# Altium PCB Sheet1.PcbDoc
Units mil, origin at the board's own origin, x right, y up, seen from the top; angles counter-clockwise.
Board outline 5395 x 1860 mil, 2 copper layers (Top Layer, Bottom Layer); 20 components, 22 nets, 127 pads, 0 vias.
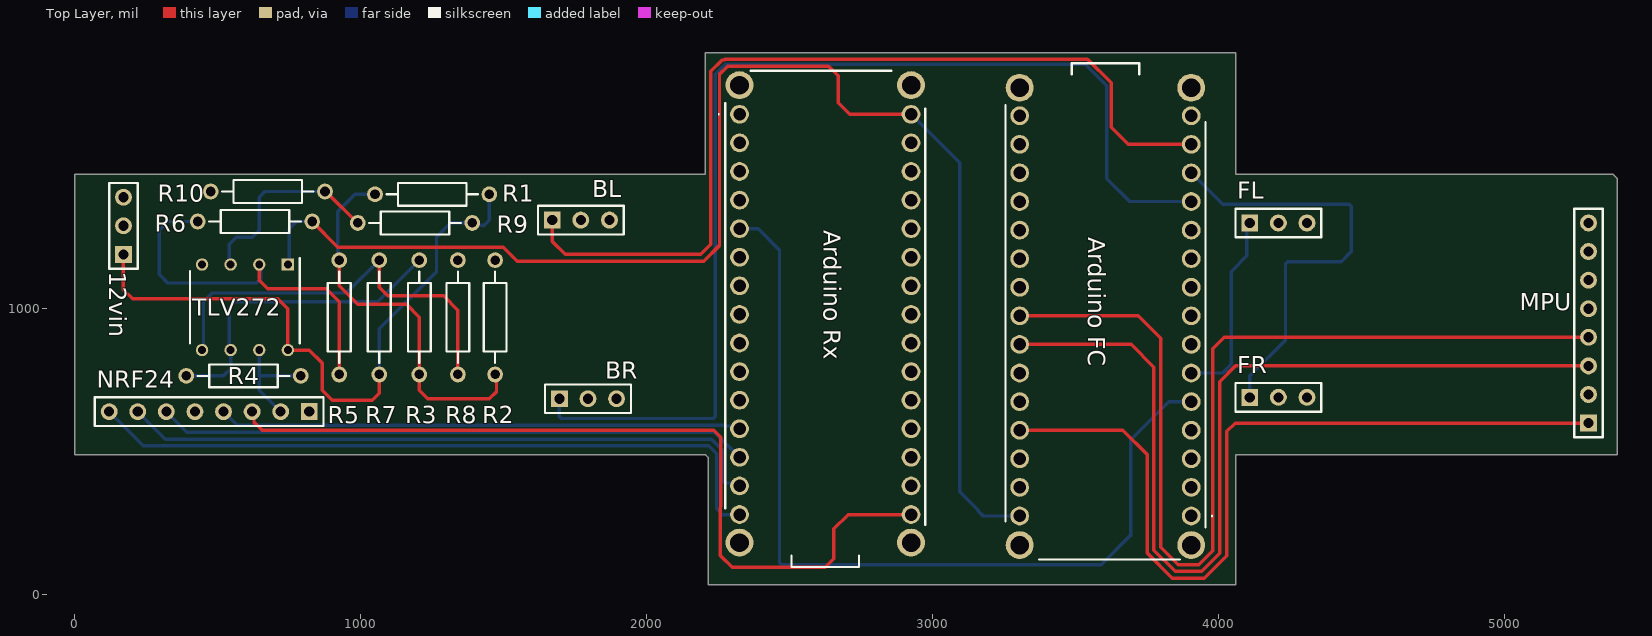
[diagram p0: Top Layer view]
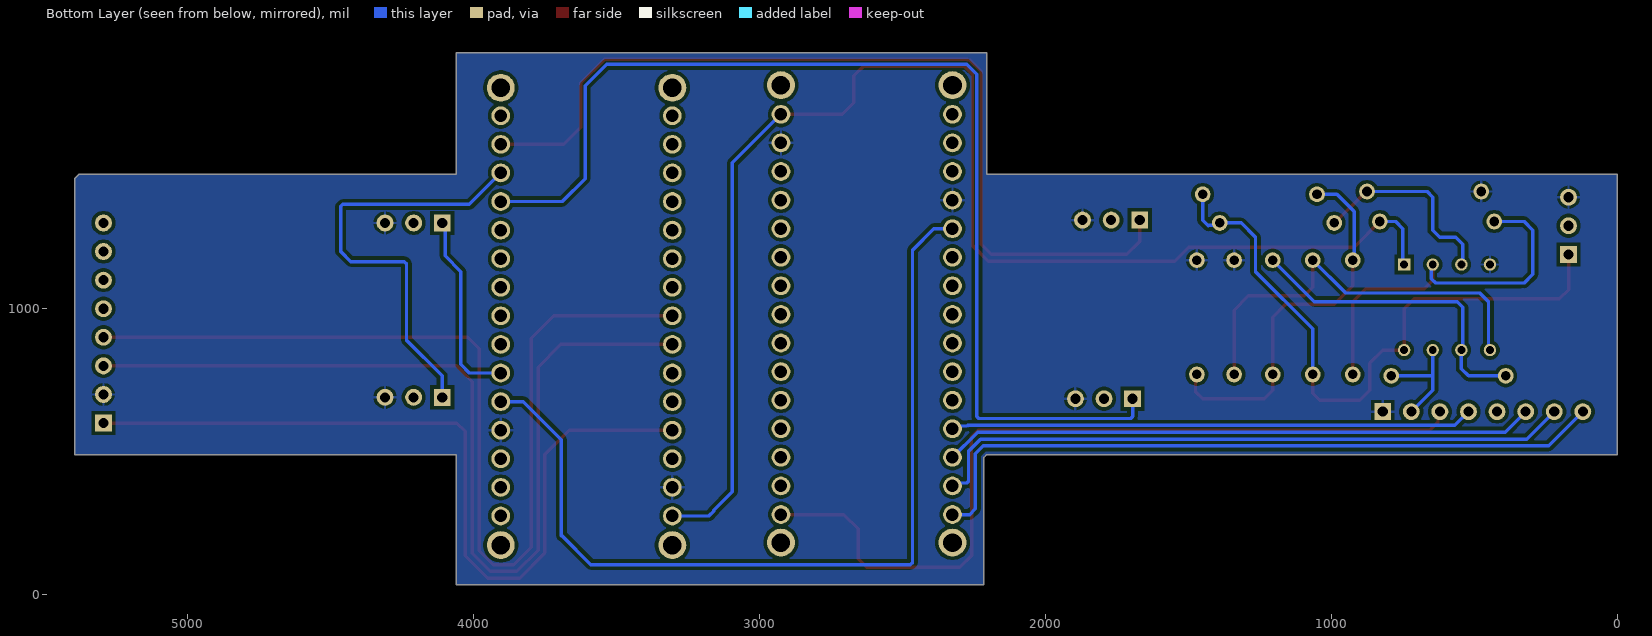
[diagram p1: Bottom Layer view, seen from below]

## Layer stack, top to bottom
Top Solder: solder mask 0.4, Solder Resist, Dk 3.5
Top Layer: signal copper 1.4
Dielectric 1: dielectric 12.6, FR-4, Dk 4.8
Bottom Layer: signal copper 1.4
Bottom Solder: solder mask 0.4, Solder Resist, Dk 3.5

## Board outline
5395,490 4060,490 4060,35 2215,35 2215,480 2205,490 0,490 0,1470 2205,1470 2205,1895 4060,1895 4060,1470 5380,1470 5395,1455

## Design rules (kind name [scope] priority, off if disabled: settings)
Clearance [All] p1: gap=12 ignorepadtopadclearanceinfootprint=FALSE except(0: Text-Hole)
PolygonConnect [All] p1: connectstyle=Relief reliefconductorwidth=10 reliefentries=4 polygonreliefangle="90 Angle" airgapwidth=10
RoutingVias [All] p1: holewidth=28 width=50 viastyle="Through Hole" minholewidth=28 minwidth=50 maxholewidth=28 maxwidth=50
SolderMaskExpansion [All] p1: expansion=4 istentingtop=FALSE
Width [All] p1: maxlimit=15 minlimit=10 preferedwidth=12 minimp=50.000000 maximp=50.000000 favimp=50.000000
30 further rules are at their usual default settings.

## Components (designator, comment, footprint, x,y, rotation, side; value= is the part's Value field where it differs from the comment)
12vin "Header 3" HDR1X3 170,1190 r90 top
"Arduino FC" "ABX00053" ABX00053 3905,275 r180 top (schematic designator "Arduino FC?")
"Arduino Rx" "ABX00053" ABX00053 2325,1680 r0 top (schematic designator "Arduino Rx?")
BL "Header 3" HDR1X3 1670,1310 r0 top (schematic designator BL?)
BR "Header 3" HDR1X3 1695,685 r0 top (schematic designator BR?)
FL "Header 3" HDR1X3 4110,1300 r0 top (schematic designator FL?)
FR "Header 3" HDR1X3 4110,690 r0 top (schematic designator FR?)
MPU "Header 8" HDR1X8 5295,600 r90 top (schematic designator MPU_?)
NRF24 "Header 8" HDR1X8 820,640 r180 top (schematic designator NRF?)
R1 "Res1" AXIAL-0.4 1250,1400 r180 top value=15k
R2 "Res2" AXIAL-0.4 1470,970 r90 top value=18k
R3 "Res3" AXIAL-0.4 1205,970 r90 top value=22k
R4 "Res4" AXIAL-0.4 590,765 r0 top value=12k
R5 "Res5" AXIAL-0.4 925,970 r270 top value=12k
R6 "Res6" AXIAL-0.4 630,1305 r180 top value=18k
R7 "Res7" AXIAL-0.4 1065,970 r90 top value=22k
R8 "Res8" AXIAL-0.4 1340,970 r90 top value=12k
R9 "Res9" AXIAL-0.4 1190,1300 r180 top value=12k
R10 "Res10" AXIAL-0.4 675,1410 r180 top value=18k
TLV272 "TL072CP" DIP760W50P254L976H406Q8N 595,1005 r270 top

## Footprints (in the part's own frame and the unit in brackets; to place one, negate y for a bottom-side part, rotate by r counter-clockwise, add the part's x,y. Pads: shape width x height; smd on the part's side, far side on the other; paste and mask are expansions set on the pad)
ABX00053 [mm]
  round 1.665 hole 1.11: 1(0,0) 2(0,-2.54) 3(0,-5.08) 4(0,-7.62) 5(0,-10.16) 6(0,-12.7) 7(0,-15.24) 8(0,-17.78) 9(0,-20.32) 10(0,-22.86) 11(0,-25.4) 12(0,-27.94) 13(0,-30.48) 14(0,-33.02) 15(0,-35.56) 16(15.24,-35.56) 17(15.24,-33.02) 18(15.24,-30.48) 19(15.24,-27.94) 20(15.24,-25.4) 21(15.24,-22.86) 22(15.24,-20.32) 23(15.24,-17.78) 24(15.24,-15.24) 25(15.24,-12.7) 26(15.24,-10.16) 27(15.24,-7.62) 28(15.24,-5.08) 29(15.24,-2.54) 30(15.24,0)
  round 2.475 hole 1.65: MH1(0,2.59) MH2(15.24,2.59) MH3(0,-38.05) MH4(15.24,-38.05)
  silkscreen extent -1.9,-40.23 16.5,3.86
AXIAL-0.4 [mm] "Axial Device, Thru-Hole; 2 Leads; 0.4 in Pin Spacing"
  round 1.4 hole 0.85: 1(-5.08,0) 2(5.08,0)
  silkscreen extent -4.06,-1.02 4.06,1.02
DIP760W50P254L976H406Q8N [mm]
  rect 1.1x1.1 / inner round 1.1 / far side rect 1.1x1.1 hole 0.7: 1(-3.8,3.81)
  round 1.1 hole 0.7: 2(-3.8,1.27) 3(-3.8,-1.27) 4(-3.8,-3.81) 5(3.8,-3.81) 6(3.8,-1.27) 7(3.8,1.27) 8(3.8,3.81)
  silkscreen extent -4.35,-4.88 3.2,4.88
HDR1X3 [mm] "Connector; Header; 3 Position"
  rect 1.5x1.5 hole 0.9: 1(0,0)
  round 1.5 hole 0.9: 2(2.54,0) 3(5.08,0)
  silkscreen extent -1.27,-1.27 6.35,1.27
HDR1X8 [mm] "Connector; Header; 8 Position"
  rect 1.5x1.5 hole 0.9: 1(0,0)
  round 1.5 hole 0.9: 2(2.54,0) 3(5.08,0) 4(7.62,0) 5(10.16,0) 6(12.7,0) 7(15.24,0) 8(17.78,0)
  silkscreen extent -1.27,-1.27 19.05,1.27

## Part data
12vin BL BR FL FR: "Header, 3-Pin", LatestRevisionDate=17-Jul-2002, LatestRevisionNote="Re-released for DXP Platform.", Publisher="Altium Limited"
"Arduino FC" "Arduino Rx": "Development Boards & Kits - AVR Arduino Nano RP2040 Connect with header", Manufacturer_Name=Arduino, Mouser Part Number=782-ABX00053, Arrow Part Number=ABX00053, Arrow Price/Stock=https://www.arrow.com/en/products/abx00053/arduino-corporation?region=nac, Datasheet Link=https://content.arduino.cc/assets/ABX00053-datasheet.pdf, Geometry.Height=3.25mm, Manufacturer_Part_Number=ABX00053, Mouser Price/Stock=https://www.mouser.co.uk/ProductDetail/Arduino/ABX00053?qs=iLbezkQI%252Bsj092HEuR%252Bsvg%3D%3D
MPU NRF24: "Header, 8-Pin", LatestRevisionDate=17-Jul-2002, LatestRevisionNote="Re-released for DXP Platform.", Publisher="Altium Limited"
R1 R3 R4 R5 R6 R7 R8 R9 R10: library part Res2, "Resistor", LatestRevisionDate=17-Jul-2002, LatestRevisionNote="Re-released for DXP Platform.", PackageDescription="Axial Device, Thru-Hole; 2 Leads; 0.4 in Pin Spacing", PackageReference=AXIAL-0.4, Published=8-Jun-2000, Publisher="Altium Limited"
R2: "Resistor", LatestRevisionDate=17-Jul-2002, LatestRevisionNote="Re-released for DXP Platform.", PackageDescription="Axial Device, Thru-Hole; 2 Leads; 0.4 in Pin Spacing", PackageReference=AXIAL-0.4, Published=8-Jun-2000, Publisher="Altium Limited"
TLV272: "Operational Amplifier, 2 Func, 13000uV Offset-Max, PDIP8", Manufacturer_Name=STMicroelectronics, Datasheet Link=https://datasheet.datasheetarchive.com/originals/distributors/Datasheets-112/DSAP0044997.pdf, Geometry.Height=4.06mm, Manufacturer_Part_Number=TL072CP

## Nets (pads, with @x,y where several pads share a name; then routed paths per layer and width w, separated by ;. In a path a pad name is that pad's centre, name@x,y a point inside that pad or via, vN(x,y) a via of type N, cw(c..) or ccw(c..) an arc to the next point about the centre after c; other vN are vias at no path point)
3.3V: NRF24.2 R4.2 TLV272.7 | length 393.5
  Bottom Layer w12: TLV272.7 645,770 ; NRF24.2 645,715 645,770 ; R4.2 650,765 645,770
5V: "Arduino FC.27" MPU.1 | length 2886.3
  Top Layer w12: 3305,575 3665.68,575 3750.68,490 3750.68,145.38 3839.06,57 3951.21,57 4030,135.79 4030,571 4059,600 MPU.1
Analog4: "Arduino FC.23" MPU.4 | length 3521
  Top Layer w12: 3305,975 3720,975 3798.68,896.32 3798.68,166.32 3860,105 3931.33,105 3980,153.67 3980,860 4020,900 MPU.4
Analog5: "Arduino FC.24" MPU.3 | length 3343.2
  Top Layer w12: 3305,875 3695,875 3774.68,795.32 3774.68,155.32 3849,81 3941.27,81 4005,144.73 4005,745 4060,800 MPU.3
CE: "Arduino Rx.12" NRF24.4 | length 1829.9
  Bottom Layer w12: NRF24.4 568,592 2271.94,592 2274.22,589.72 2315.28,589.72 2325,580
CNS: "Arduino Rx.13" NRF24.6 | length 2071.3
  Bottom Layer w12: NRF24.6 392,568 2237,568 2325,480
GND: 12vin.3 "Arduino FC.4" "Arduino FC.29" "Arduino Rx.4" "Arduino Rx.29" BL.3 BR.3 FL.3 FR.3 MPU.2 NRF24.1 R2.2 R8.2 R10.2 TLV272.4
M1: "Arduino FC.6" FL.1 | length 674.4
  Bottom Layer w12: 3905,775 4015,775 4045,805 4045,1130 4100,1185 4100,1290 FL.1
M2: "Arduino FC.12" BR.1 | length 3878.5
  Bottom Layer w12: BR.1 1695,623.03 1702.03,616 2232.97,616 2240,623.03 2240,1820 2275,1855 3535,1855 3610,1780 3610,1455 3690,1375 3905,1375
M3: "Arduino FC.13" FR.1 | length 1533.6
  Bottom Layer w12: 3905,1475 4015,1365 4457.97,1365 4465,1357.97 4465,1200 4430,1165 4242.03,1165 4235,1157.97 4235,890 4110,765 FR.1
M4: "Arduino FC.14" BL.1 | length 3179.9
  Top Layer w12: BL.1 1670,1235 1715,1190 2190,1190 2225,1225 2225,1830 2265,1870 2271.06,1870 2273.75,1872.69 3542.31,1872.69 3625,1790 3625,1635 3685,1575 3905,1575
MISO: "Arduino Rx.15" NRF24.8 | length 2466.7
  Bottom Layer w12: NRF24.8 240,520 2217.12,520 2245,492.12 2245,300 2265,280 2325,280
MOSI: "Arduino Rx.14" NRF24.7 | length 2274.8
  Bottom Layer w12: NRF24.7 316,544 2227.06,544 2269,502.06 2269,396 2274.75,390.25 2314.75,390.25 2325,380
Net12vin_1: 12vin.1 R1.1 R7.1 R9.1 TLV272.8 | length 2265
  Top Layer w12: 12vin.1 170,1067.03 202.03,1035 710,1035 745,1000 TLV272.8 819.61,855.39 865,810 865,715 900,680 1040,680 1065,705 R7.1
  Bottom Layer w12: R7.1 1065,930 1265,1130 1265,1250 1315,1300 R9.1 1398.25,1291.75 1428.25,1291.75 1430,1290 1450,1310 R1.1
"NetArduino FC?_30": "Arduino FC.30" "Arduino Rx.30" R6.1 TLV272.1 | length 4766.9
  Top Layer w12: R6.1 919.44,1215.56 1497.94,1215.56 1547.5,1166 2199.94,1166 2255,1221.06 2255,1820 2283.69,1848.69 2636.31,1848.69 2670,1815 2670,1720 2710,1680 2925,1680
  Bottom Layer w12: TLV272.1 750,1159.61 750,1280 775,1305 R6.1 ; 2925,1680 3095,1510 3095,360 3160,295 3160,292.03 3177.03,275 3305,275
NetR1_2: R1.2 R2.1 R3.1 R5.1 | length 1352.3
  Top Layer w12: R5.1 925,1080 990,1015 1160,1015 1205,970 R3.1 1205,715 1235,685 1450,685 1475,710 1475,765 R2.1
  Bottom Layer w12: R5.1 920,1175 920,1340 980,1400 R1.2
NetR3_2: R3.2 R4.1 TLV272.6 | length 1115.8
  Bottom Layer w12: R4.1 520,765 545,790 TLV272.6 540,860.39 540,1005 560,1025 1060,1025 R3.2
NetR5_2: R5.2 R6.2 TLV272.2 | length 1348.5
  Top Layer w12: TLV272.2 645,1100 675,1070 880,1070 925,1025 R5.2
  Bottom Layer w12: 334.97,1089.97 325.03,1089.97 295,1120 295,1275 325,1305 R6.2 ; 335,1090 635,1090 650.03,1105.03 650.03,1149.58 TLV272.2
NetR7_2: R7.2 R8.1 TLV272.5 | length 1479.9
  Top Layer w12: R7.2 1065,1075 1095,1045 1290,1045 1340,995 R8.1@1340,765
  Bottom Layer w12: TLV272.5 450,860.39 450,1025 480,1055 950,1055 R7.2
NetR9_2: R9.2 R10.1 TLV272.3 | length 712.1
  Top Layer w12: R10.1 877.5,1410 987.5,1300 R9.2
  Bottom Layer w12: TLV272.3 540,1159.61 540,1225 565,1250 620.06,1250 645.03,1274.97 ; 645,1275 645,1390 665,1410 R10.1
PPM: "Arduino FC.5" "Arduino Rx.5" | length 3140.5
  Bottom Layer w12: 2325,1280 2390,1280 2465,1205 2465,112.03 2472.03,105 3590,105 3690,205 3692.97,205 3692.97,542.03 3825.94,675 3905,675
SCK: "Arduino Rx.16" NRF24.3 | length 2931
  Top Layer w12: NRF24.3 626.61,633.39 626.61,603.39 655,575 2235,575 2260,550 2260,308.03 2258.28,306.31 2258.28,136.72 2300,95 2625,95 2655,125 2655,230 2705,280 2925,280
pads on no net: 12vin.2 "Arduino FC.1" "Arduino FC.2" "Arduino FC.3" "Arduino FC.7" "Arduino FC.8" "Arduino FC.9" "Arduino FC.10" "Arduino FC.11" "Arduino FC.15" "Arduino FC.16" "Arduino FC.17" "Arduino FC.18" "Arduino FC.19" "Arduino FC.20" "Arduino FC.21" "Arduino FC.22" "Arduino FC.25" "Arduino FC.26" "Arduino FC.28" "Arduino FC.MH1" "Arduino FC.MH2" "Arduino FC.MH3" "Arduino FC.MH4" "Arduino Rx.1" "Arduino Rx.2" "Arduino Rx.3" "Arduino Rx.6" "Arduino Rx.7" "Arduino Rx.8" "Arduino Rx.9" "Arduino Rx.10" "Arduino Rx.11" "Arduino Rx.17" "Arduino Rx.18" "Arduino Rx.19" "Arduino Rx.20" "Arduino Rx.21" "Arduino Rx.22" "Arduino Rx.23" "Arduino Rx.24" "Arduino Rx.25" "Arduino Rx.26" "Arduino Rx.27" "Arduino Rx.28" "Arduino Rx.MH1" "Arduino Rx.MH2" "Arduino Rx.MH3" "Arduino Rx.MH4" BL.2 BR.2 FL.2 FR.2 MPU.5 MPU.6 MPU.7 MPU.8 NRF24.5

## Polygon pours and split planes (outlines as drawn)
GND on Bottom Layer "GND_L02_P001" (solid, pour order 1): 5395,490 4060,490 4060,35 2215,35 2215,480 2205,490 0,490 0,1470 2205,1470 2205,1895 4060,1895 4060,1470 5380,1470 5395,1455